# Altium PCB KeyBoard.PcbDoc
Units mm, origin at the board's own origin, x right, y up, seen from the top; angles counter-clockwise.
Board outline 92.5 x 37.5 mm, 2 copper layers (Top Layer, Bottom Layer); 13 components, 7 nets, 60 pads, 0 vias.
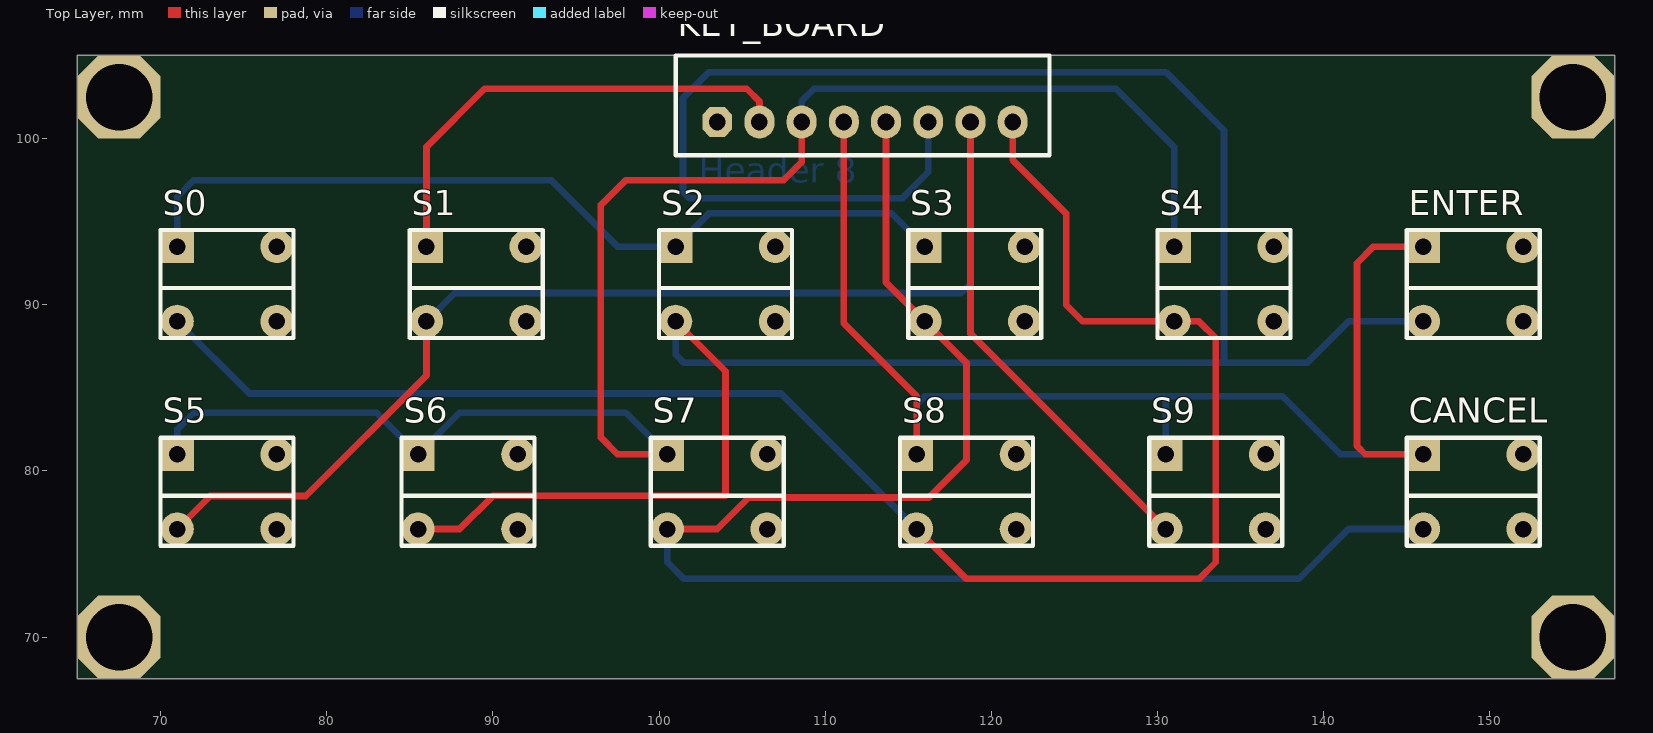
[diagram p0: Top Layer view]
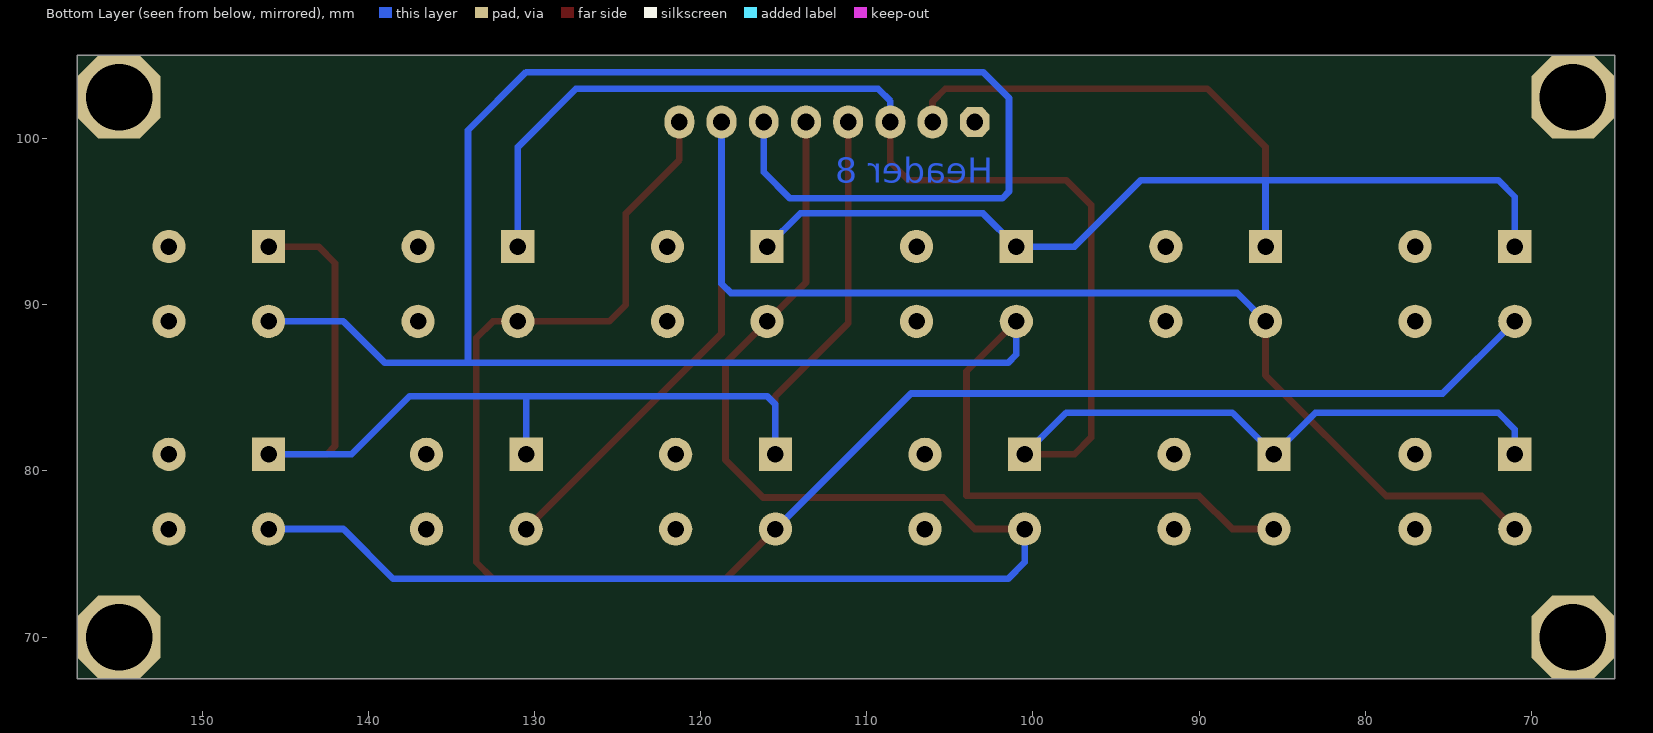
[diagram p1: Bottom Layer view, seen from below]

## Layer stack, top to bottom
Top Layer: signal copper 0.0356
Dielectric: dielectric 0.32, FR-4, Dk 4.8
Bottom Layer: signal copper 0.0356

## Board outline
65,105 157.5,105 157.5,67.5 65,67.5 65,105

## Design rules (kind name [scope] priority, off if disabled: settings)
Clearance [All] p1: gap=0.5
PolygonConnect [All] p1: connectstyle=Relief reliefconductorwidth=0.254 reliefentries=4 polygonreliefangle="90 Angle"
RoutingVias [All] p1: holewidth=0.711 width=1.27 viastyle="Through Hole" minholewidth=0.711 minwidth=1.27 maxholewidth=0.711 maxwidth=1.27
SilkscreenOverComponentPads [All] p1: minsilkscreentomaskgap=0.254
SolderMaskExpansion [All] p1: expansion=0.102
Width [All] p1: maxlimit=2 minlimit=0.3 preferedwidth=0.4
27 further rules are at their usual default settings.

## Components (designator, comment, footprint, x,y, rotation, side; value= is the part's Value field where it differs from the comment)
CANCEL "SW-PB" BUTTON 146,81 r0 top
ENTER "SW-PB" BUTTON 146,93.5 r0 top
KEY_BOARD "Header 8" Cap_8 103.5,101 r0 top
S0 "SW-PB" BUTTON 71,93.5 r0 top
S1 "SW-PB" BUTTON 86,93.5 r0 top
S2 "SW-PB" BUTTON 101,93.5 r0 top
S3 "SW-PB" BUTTON 116,93.5 r0 top
S4 "SW-PB" BUTTON 131,93.5 r0 top
S5 "SW-PB" BUTTON 71,81 r0 top
S6 "SW-PB" BUTTON 85.5,81 r0 top
S7 "SW-PB" BUTTON 100.5,81 r0 top
S8 "SW-PB" BUTTON 115.5,81 r0 top
S9 "SW-PB" BUTTON 130.5,81 r0 top

## Footprints (in the part's own frame and the unit in brackets; to place one, negate y for a bottom-side part, rotate by r counter-clockwise, add the part's x,y. Pads: shape width x height; smd on the part's side, far side on the other; paste and mask are expansions set on the pad)
BUTTON [mm]
  rect 2x2 hole 1: 1(0,0)
  round 2 hole 1: 2(0,-4.5) 3(6,0) 4(6,-4.5)
  silkscreen extent -1,-5.5 7,1
Cap_8 [mm]
  oct 1.8x1.8 hole 1: 1(0,0)
  oval 1.8x2 hole 1: 2(2.54,0) 3(5.08,0) 4(7.62,0) 5(10.16,0) 6(12.7,0) 7(15.24,0) 8(17.78,0)
  silkscreen extent -2.5,-2 20,4

## Part data
CANCEL ENTER S0 S1 S2 S3 S4 S5 S6 S7 S8 S9: "Switch"
KEY_BOARD: "Header, 8-Pin"

## Free pads (board coordinates)
  oct 5x5 hole 4: 4(155,102.5) 5(155,70) 6(67.5,70) 7(67.5,102.5)

## Nets (pads, with @x,y where several pads share a name; then routed paths per layer and width w, separated by ;. In a path a pad name is that pad's centre, name@x,y a point inside that pad or via, vN(x,y) a via of type N, cw(c..) or ccw(c..) an arc to the next point about the centre after c; other vN are vias at no path point)
COL1: CANCEL.1 ENTER.1 KEY_BOARD.4 S8.1 S9.1 | length 80.1
  Top Layer w0.4: KEY_BOARD.4 111.12,88.88 115.5,84.5 S8.1 ; CANCEL.1 142.5,81 142,81.5 142,92.5 143,93.5 ENTER.1
  Bottom Layer w0.4: S8.1 115.5,84 116,84.5 130.5,84.5 ; S9.1 130.5,84.5 ; CANCEL.1 141,81 137.5,84.5 130.5,84.5
COL2: KEY_BOARD.3 S4.1 S5.1 S6.1 S7.1 | length 99.9
  Top Layer w0.4: S7.1 97.5,81 96.5,82 96.5,96 98,97.5 107.5,97.5 108.58,98.58 KEY_BOARD.3
  Bottom Layer w0.4: S5.1 71,82.5 72,83.5 83,83.5 S6.1 88,83.5 98,83.5 S7.1 ; KEY_BOARD.3 108.58,102.255 109.325,103 127.5,103 131,99.5 S4.1
COL3: KEY_BOARD.2 S0.1 S1.1 S2.1 S3.1 | length 84.8
  Top Layer w0.4: S1.1 86,99.5 89.5,103 105.275,103 106.04,102.235 KEY_BOARD.2
  Bottom Layer w0.4: S0.1 71,96.5 72,97.5 93.5,97.5 97.5,93.5 S2.1 103,95.5 114,95.5 S3.1 ; S1.1 86,97.5
ROW1: KEY_BOARD.8 S0.2 S4.2 S8.2 | length 105
  Top Layer w0.4: S8.2 118.5,73.5 132.5,73.5 133.5,74.5 133.5,88 132.5,89 125.5,89 124.5,90 124.5,95.5 121.28,98.72 KEY_BOARD.8
  Bottom Layer w0.4: S0.2 75.342,84.658 107.342,84.658 S8.2
ROW2: KEY_BOARD.7 S1.2 S5.2 S9.2 | length 94.9
  Top Layer w0.4: S5.2 72.986,78.486 78.74,78.486 86,85.746 S1.2 ; KEY_BOARD.7 118.74,88.26 S9.2
  Bottom Layer w0.4: S1.2 87.703,90.703 118.181,90.703 118.74,91.262 KEY_BOARD.7
ROW3: ENTER.2 KEY_BOARD.6 S2.2 S6.2 | length 152.2
  Top Layer w0.4: S6.2 88,76.5 90,78.5 104,78.5 104,86 S2.2
  Bottom Layer w0.4: S2.2 101,87 101.5,86.5 134,86.5 ; KEY_BOARD.6 116.2,97.982 114.619,96.401 101.851,96.401 101.441,96.811 101.441,102.441 103,104 130.5,104 134,100.5 134,86.5 ; ENTER.2 141.5,89 139,86.5 134,86.5
ROW4: CANCEL.2 KEY_BOARD.5 S3.2 S7.2 | length 91.2
  Top Layer w0.4: S7.2 103.5,76.5 105.4,78.4 116.246,78.4 118.5,80.654 118.5,86.5 S3.2 113.66,91.34 KEY_BOARD.5
  Bottom Layer w0.4: S7.2 100.5,74.5 101.5,73.5 138.5,73.5 141.5,76.5 CANCEL.2
pads on no net: CANCEL.3 CANCEL.4 ENTER.3 ENTER.4 KEY_BOARD.1 S0.3 S0.4 S1.3 S1.4 S2.3 S2.4 S3.3 S3.4 S4.3 S4.4 S5.3 S5.4 S6.3 S6.4 S7.3 S7.4 S8.3 S8.4 S9.3 S9.4